# EAGLE board ATX PSU Breakout Mini (EAGLE 6.6.0)
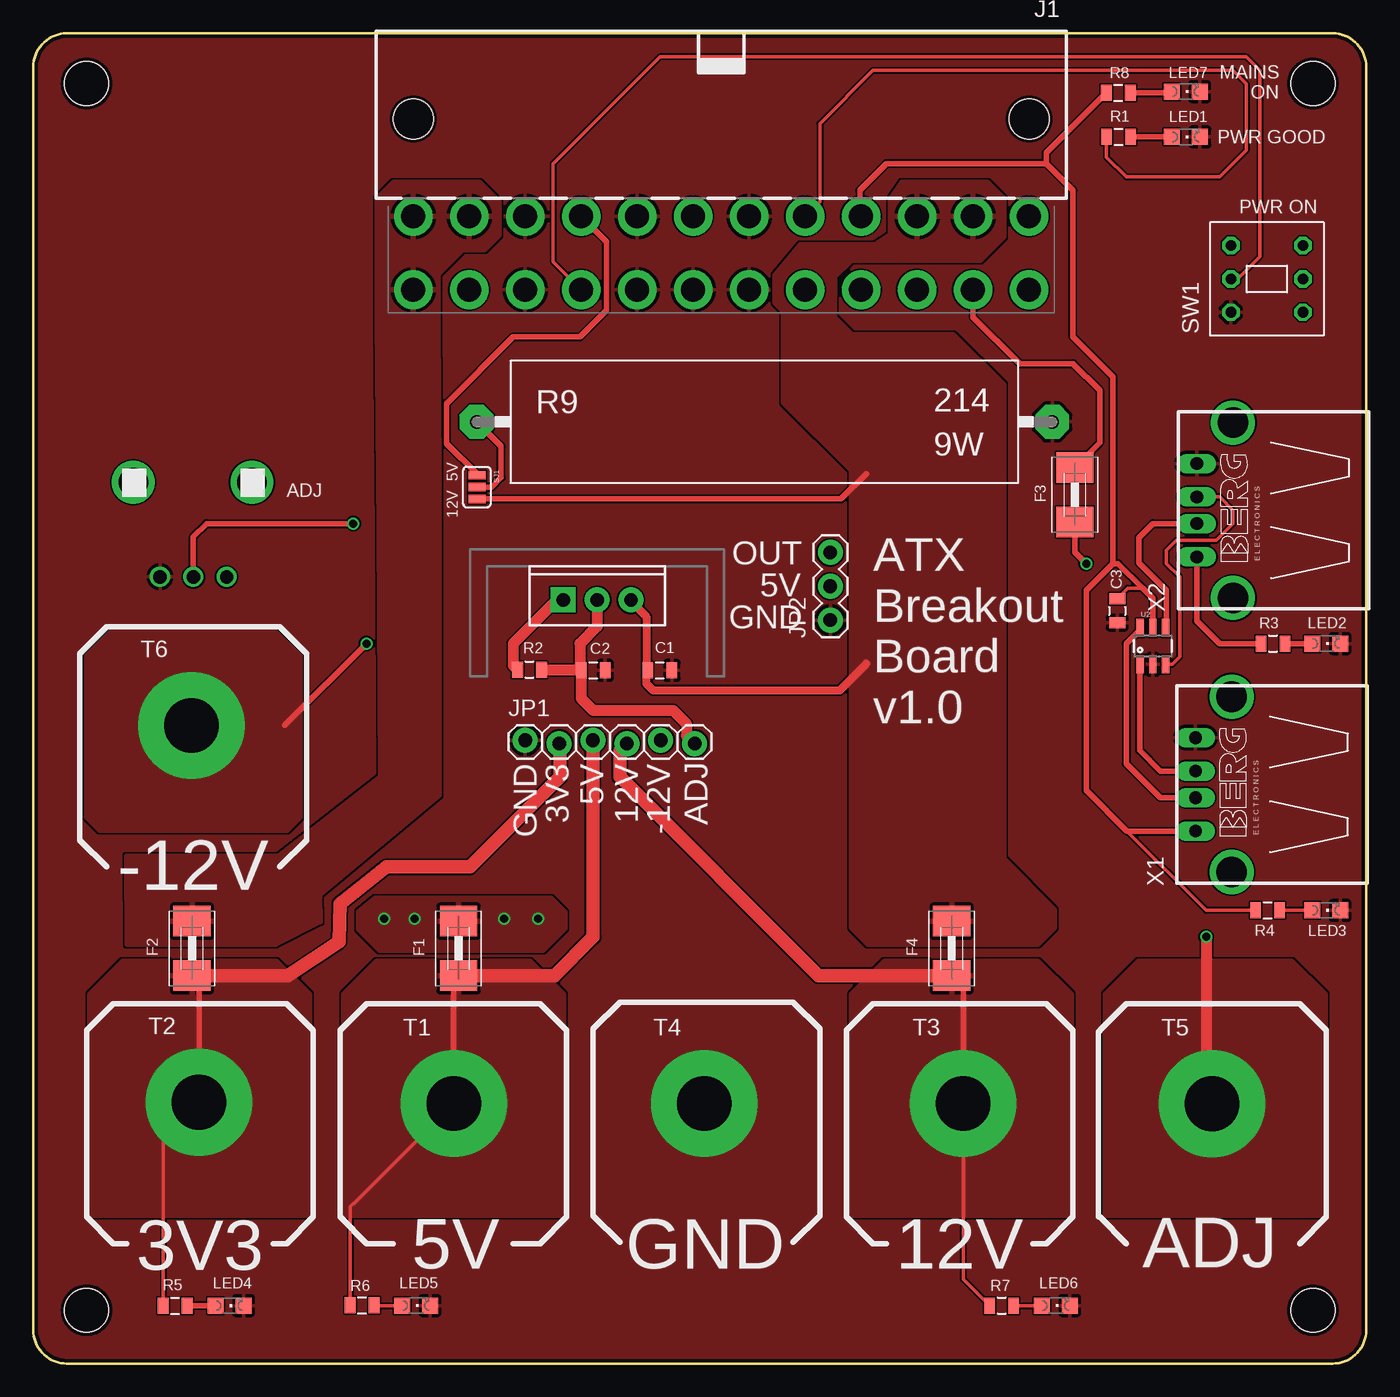
[diagram p0: board, top side]
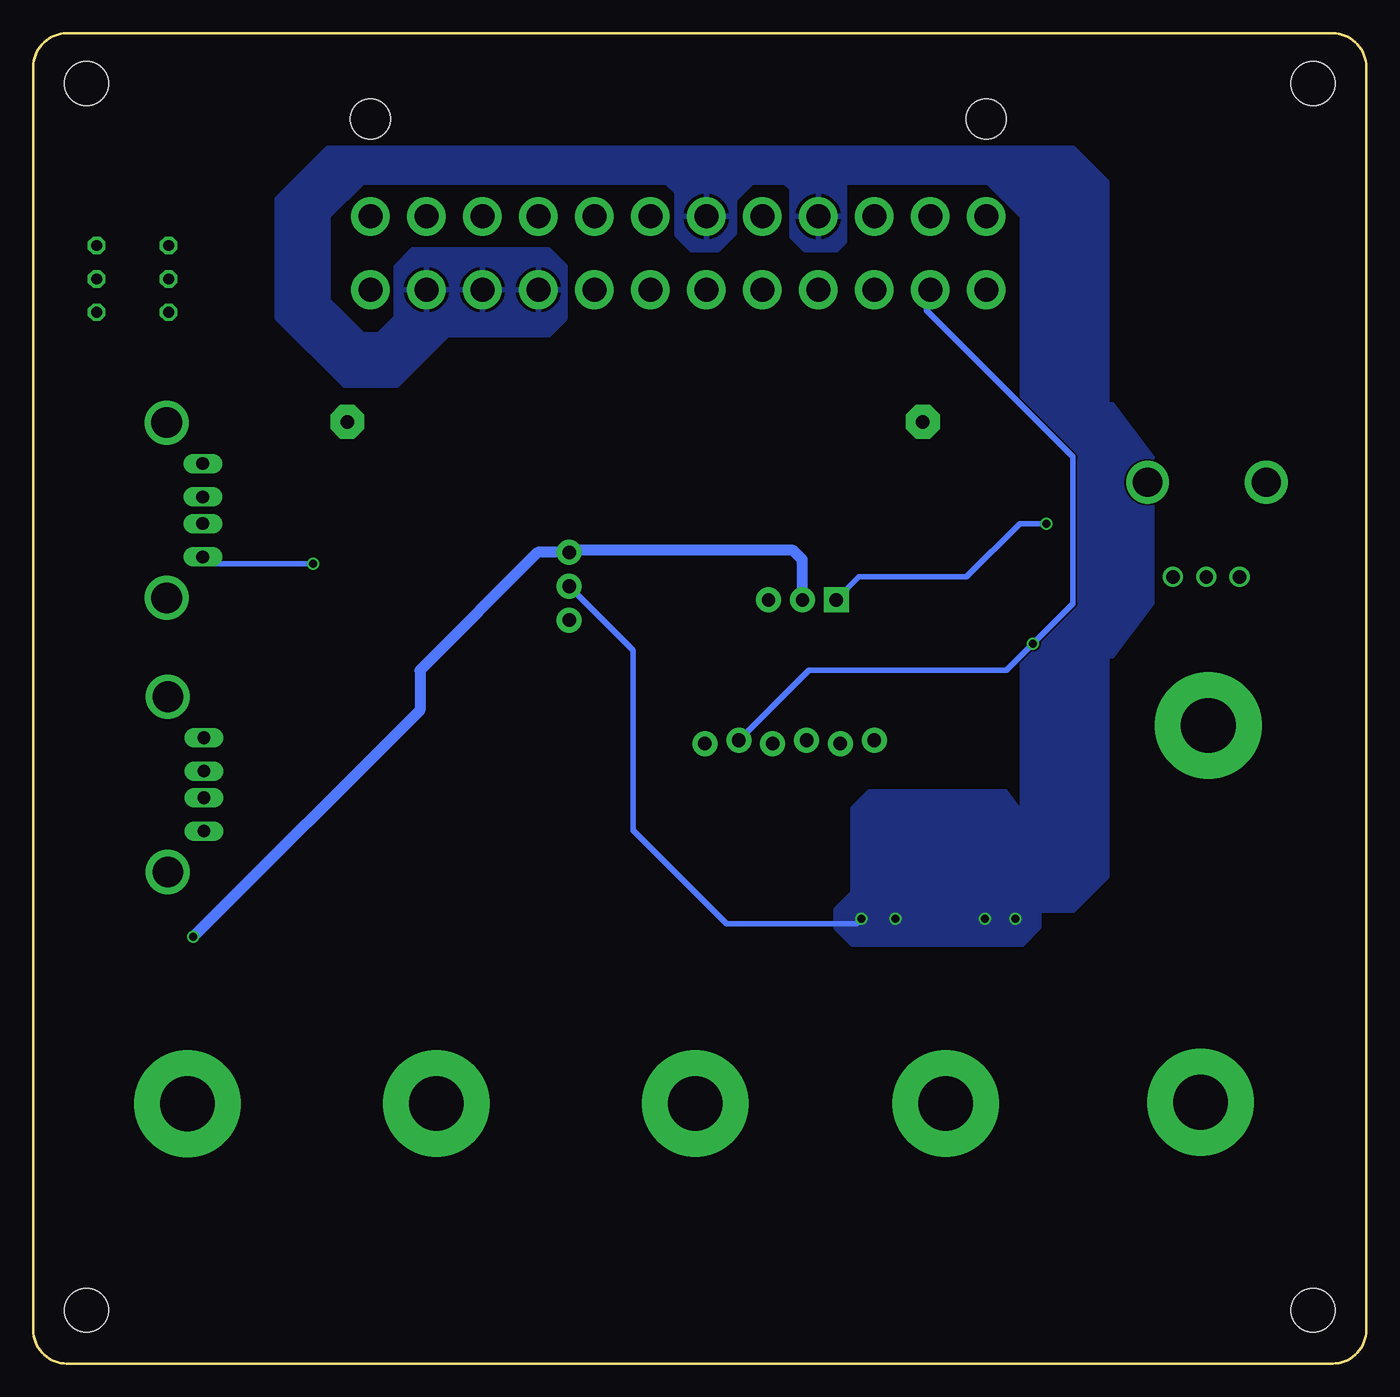
[diagram p1: board, bottom side, seen from below]

Size 100 x 99.77 mm. Coordinates in mm from the lower left corner, seen from the top.
Outline: 2.5,99.77 97.5,99.77 arc-90 100,97.27 100,2.5 arc-90 97.5,0 2.5,0 arc-90 0,2.5 0,97.27 arc-90 2.5,99.77
Copper layers (1*16): Top 0.035mm / dielectric 1.5mm / Bottom 0.035mm
Design rules "dirt_cheap_dirty_boards.v1": minimum track width 5mil, minimum drill 12mil, track to track 5mil, track to pad 5mil, pad to pad 5mil, via to via 5mil, smd to smd 0mil, copper to edge 10mil, drill to drill 10mil, minimum pad ring 10mil, minimum via ring 6mil, stop-mask expansion 2mil, vias tented up to drill 25mil, thermal gap 10mil
tKeepout: area 6.9,14.1 to 17.9,25.1; area 44.9,14 to 55.9,25; area 64.3,14 to 75.3,25; area 26,14 to 37,25; area 82.9,14 to 93.9,25; area 6.4,42.4 to 17.4,53.4

## Footprints (pad centres in the part's own frame; a part is rotated, then mirrored left to right if it is on the bottom)
0805 = smd 0.8 x 1.2: 1 -0.9,0; 2 0.9,0
1812 = smd 2.286 x 2.794: 1 -2.046,0; 2 2.046,0
ATX24_RIGHT_ANGLE = drill 1.8 pad 2.9: 1 23.1,4.76; 2 18.9,4.76; 3 14.7,4.76; 4 10.5,4.76; 5 6.3,4.76; 6 2.1,4.76; 7 -2.1,4.76; 8 -6.3,4.76; 9 -10.5,4.76; 10 -14.7,4.76; 11 -18.9,4.76; 12 -23.1,4.76; 13 23.1,10.26; 14 18.9,10.26; 15 14.7,10.26; 16 10.5,10.26; 17 6.3,10.26; 18 2.1,10.26; 19 -2.1,10.26; 20 -6.3,10.26; 21 -10.5,10.26; 22 -14.7,10.26; 23 -18.9,10.26; 24 -23.1,10.26 | hole 3: -23.1,-2.54; 23.1,-2.54
1X06_LOCK = drill 1.016 pad 1.88: 1 0,0; 2 2.54,-0.254; 3 5.08,0; 4 7.62,-0.254; 5 10.16,0; 6 12.7,-0.254
1X03 = drill 1.016 pad 1.88: 1 0,0; 2 2.54,0; 3 5.08,0
CHIPLED_0805 = smd 1.2 x 1.2: A 0,-1.05; C 0,1.05
KH214-8 = drill 1.016 pad 2.54 octagon: 1 -21.59,0; 2 21.59,0
SJ_3 = smd 0.635 x 1.27: 1 -0.889,0; 2 0,0; 3 0.889,0
SW_PUSH_BUTTON_MINI = drill 0.8 octagon: 1 2.5,2.7; 2 0,2.7; 3 -2.5,2.7; 4 2.5,-2.7; 5 0,-2.7; 6 -2.5,-2.7
PAD_ROUND_4.1MM = drill 4.1 pad 8: P 0,0
TO220-ADJ = drill 1 pad 1.88 square: ADJ -2.54,0 | drill 1 pad 1.88: IN 2.54,0; OUT 0,0
SOT23-6 = smd 0.55 x 1.35: 1 -0.95,-1.375; 2 0,-1.375; 3 0.95,-1.375; 4 0.95,1.375; 5 0,1.375; 6 -0.95,1.375
STAND-OFF = hole 3.302: 0,0
ALPHA_9MM_PCB = drill 1: 1 -2.5,-4; 2 0,-4; 3 2.5,-4 | drill 2.2: P$1 -4.5,3.1; P$2 4.4,3.1
PN87520-S = drill 0.95 long: 1 -3.5,2.71; 2 -1,2.71; 3 1,2.71; 4 3.5,2.71 | drill 2.3 pad 2.9: S1 -6.57,0; S2 6.57,0

## Placement (x,y rotation side)
C1  0.1uF  [0805]  47,52 0 top
C2  1.0uF  [0805]  42,52 0 top
C3  0.1uF  [0805]  81.32,56.46 270 top
F1  3A  [1812]  31.9,31.14 90 top
F2  3A  [1812]  11.9,31.14 90 top
F3  3A  [1812]  78.14,65.17 90 top
F4  3A  [1812]  68.9,31.14 90 top
J1  ATX24RH  [ATX24_RIGHT_ANGLE]  51.61,90.8 180 top
JP1  [1X06_LOCK]  36.91,46.75 0 top
JP2  [1X03]  59.8,55.76 90 top
LED1  GREEN  [CHIPLED_0805]  86.47,92 270 top
LED2  [CHIPLED_0805]  97,54 270 top
LED3  [CHIPLED_0805]  97,34 270 top
LED4  [CHIPLED_0805]  14.72,4.34 270 top
LED5  [CHIPLED_0805]  28.71,4.35 270 top
LED6  [CHIPLED_0805]  76.71,4.35 270 top
LED7  RED  [CHIPLED_0805]  86.45,95.4 270 top
R1  3.3k  [0805]  81.42,92 0 top
R2  330  [0805]  37.23,52.04 0 top
R3  1.2k  [0805]  93,54 0 top
R4  1.2k  [0805]  92.61,34 0 top
R5  1.2k  [0805]  10.64,4.33 0 top
R6  3.3k  [0805]  24.67,4.37 0 top
R7  10k  [0805]  72.65,4.34 0 top
R8  3.3k  [0805]  81.4,95.3 0 top
R9  [KH214-8]  54.85,70.63 0 top
SJ1  [SJ_3]  33.28,65.74 270 top
SW1  SW_PUSH_DPDT  [SW_PUSH_BUTTON_MINI]  92.55,81.35 90 top
T1  5V  [PAD_ROUND_4.1MM]  31.54,19.5 0 top
T2  3V3  [PAD_ROUND_4.1MM]  12.43,19.6 0 top
T3  12V  [PAD_ROUND_4.1MM]  69.77,19.5 0 top
T4  GND  [PAD_ROUND_4.1MM]  50.33,19.5 0 top
T5  ADJ  [PAD_ROUND_4.1MM]  88.44,19.49 0 top
T6  -12V  [PAD_ROUND_4.1MM]  11.85,47.87 0 top
U1  V_REG_317SINK  [TO220-ADJ]  42.3,57.28 0 top
U2  TPS2513  [SOT23-6]  83.99,53.82 0 top
U$1  [STAND-OFF]  96,96 0 top
U$2  [STAND-OFF]  96,4 0 top
U$3  [STAND-OFF]  4,4 0 top
U$4  [STAND-OFF]  4,96 0 top
VR1  ALPHA_9MM_PCB  [ALPHA_9MM_PCB]  12,63 0 top
X1  PN87520-S  [PN87520-S]  89.91,43.44 90 top
X2  PN87520-S  [PN87520-S]  90,64 90 top

## Library data of the parts
C1 = SparkFun-Capacitors; PROD_ID: CAP-11625; VALUE: 1.0uF
C2 C3 = SparkFun-Capacitors; PROD_ID: CAP-11625
F1-F4 LED1-LED7 = adafruit
J1 JP1 JP2 = SparkFun-Connectors
R1-R8 = SparkFun-Resistors
R9 = resistor-power; OC_FARNELL: unknown; OC_NEWARK: unknown
SJ1 = SparkFun-Retired
SW1 = dp_devices.v6
T1-T6 = dp_devices
U1 = SparkFun-PowerIC
U2 = SparkFun-DigitalIC
U$1-U$4 = SparkFun-Electromechanical
VR1 = Fra
X1 X2 = con-berg; OC_FARNELL: unknown; OC_NEWARK: unknown

## Nets
3V3: F2.2 J1.1 J1.2 J1.13
3V3OUT: F2.1 JP1.2 R5.1 T2.P
5V: F1.2 F3.2 J1.4 J1.6 J1.21 J1.22 J1.23 JP2.2 SJ1.1
5V_STDBY: C3.1 J1.9 R4.1 R8.1 U2.5 X1.1
5VOUT: F1.1 JP1.3 R6.1 T1.P
12V: C1.1 F4.2 J1.10 J1.11 SJ1.3 U1.IN
12VOUT: F4.1 JP1.4 R7.1 T3.P
-12V: J1.14 JP1.5 T6.P
DM1: U2.6 X1.2
DM2: U2.4 X2.2
DP1: U2.1 X1.3
DP2: U2.3 X2.3
GND: C1.2 C2.2 C3.2 J1.3 J1.5 J1.7 J1.15 J1.17 J1.18 J1.19 JP1.1 JP2.1 LED1.C LED2.C LED3.C LED4.C LED5.C LED6.C LED7.C R9.2 SW1.3 T4.P U2.2 VR1.1 X1.4 X2.4
N$1: J1.8 R1.1
N$2: LED1.A R1.2
N$7: R9.1 SJ1.2
N$9: R2.1 U1.ADJ VR1.2
N$10: J1.16 SW1.2
N$14: LED7.A R8.2
N$16: LED3.A R4.2
N$17: LED2.A R3.2
N$19: LED4.A R5.2
N$20: LED5.A R6.2
N$21: LED6.A R7.2
USB_P4: F3.1 R3.1 X2.1
VOUT: C2.1 JP1.6 JP2.3 R2.2 T5.P U1.OUT

## Tracks (layer width: path | path; a pad name or v marks a point on that pad's centre or on a via)
3V3
  pour Top: 7.03,31.46 18.19,31.46 21.5,33.14 21.48,35.17 30.43,42.62 30.43,66.42 30.38,78.45 30.38,81.75 32.16,83.53 33.81,83.53 34.95,84.67 34.95,87.09 33.43,88.61 27.08,88.61 25.81,87.34 25.81,78.45 25.94,62.45 26.06,44.02 18.46,38.08 7.01,38.05
3V3OUT
  Top 0.254: T2.P 9.74,16.91 R5.1
  Top 0.406: F2.1 12.43,28.56 T2.P
  Top 1.016: F2.1 19.09,29.09 22.94,31.65 23,34.5 26.5,37.25 32.75,37.25 39.5,44 39.5,46.45 JP1.2
  pour Top: 4.22,11.14 20.73,11.14 20.73,27.65 18.19,30.19 6.76,30.19 4.22,27.65
5V  (via drill 0.6)
  Top 0.406: J1.23 70.51,78.49 74,75 78,75 80,73 80,69.08 F3.2 | SJ1.1 33.28,66.72 31,69 31,72 36,77 41,77 43,79 43,84.15 J1.4
  Bottom 0.406: v37.88,33.37 38.24,33 48,33 55,40 55,53.5 JP2.2
  other vias: 26.32,33.37 28.6,33.37 35.34,33.37
  pour Bottom: 39.14,89.25 39.14,84.16 39.78,83.53 42.07,83.53 43.08,84.55 43.08,88.1 43.59,88.61 46.13,88.61 47.4,87.34 47.4,84.8 48.67,83.53 50.58,83.53 51.72,84.67 51.72,87.85 52.48,88.61 75.34,88.61 77.88,86.07 77.88,79.72 75.34,77.18 74.07,77.18 72.8,78.45 72.8,82.26 71.53,83.53 61.37,83.53 60.1,82.26 60.1,78.45 61.37,77.18 68.99,77.18 72.8,73.37 76.61,73.37 81.69,78.45 81.69,87.34 77.88,91.15 41.05,91.15
  pour Bottom: 39.78,32.73 39.78,34 38.51,35.27 38.51,41.62 37.24,42.89 27.08,42.89 25.81,41.16 25.81,86.07 28.35,88.61 41.05,88.61 41.05,91.15 22,91.15 19.46,88.61 19.46,36.54 22,34 24.54,34 24.54,32.73 25.81,31.46 38.51,31.46
  pour Top: 26,31 24.4,32.6 24.4,33.9 25.65,34.9 38.8,34.9 39.9,33.8 39.9,32.7 38.2,31
  pour Bottom: 20,72 19,72 16,68 16,57 19,53 20,53
5V_STDBY
  Top 0.254: R4.1 88,34 82.06,39.94 | C3.1 82.11,58.15 83.23,58.15
  Top 0.406: 76,90 78,88 78,77 81,74 81,60 | 76,90 64,90 62,88 62,86.15 J1.9 | 76,90 76,90.8 R8.1 | U2.5 84,57.39 83.69,57.69 83.23,58.15 81.38,60 81,60 | 81,60 79,58 79,43 82.06,39.94 X1.1
5VOUT
  Top 0.254: T1.P 24.04,12 24,12 23.77,11.77 R6.1
  Top 0.406: F1.1 31.54,28.73 T1.P | JP1.3
  Top 1.016: F1.1 39.09,29.09 42,32 JP1.3
  pour Top: 23.27,11.14 39.78,11.14 39.78,27.65 37.24,30.19 25.81,30.19 23.27,27.65
12V
  Top 0.406: SJ1.3 60.6,64.85 62.5,66.75
  Top 0.61: U1.IN 44.84,57.16 46,56 46,52.1 C1.1 | C1.1 46.1,51.9 | C1.1 46,51.9 46,51 46.5,50.5 60.5,50.5 62.5,52.5
  pour Top: 75.34,35.27 63.91,35.27 62.64,35.27 61.37,34 61.37,32.73 62.64,31.46 75.34,31.46 76.61,32.73 76.61,34
  pour Top: 64.29,84.67 64.29,87.34 65.18,88.61 71.53,88.61 72.8,87.34 72.8,84.55 71.02,82.77 61.37,82.77 60.1,81.5 60.1,78.45 61.37,77.18 68.99,77.18 72.8,73.37 72.8,37.81 76.61,34 76.61,32.73 75.34,31.46 62.64,31.46 61.37,32.73 61.37,67.02 56.29,72.1 56.29,78.96 55.66,79.59 55.66,81.62 57.56,83.91 63.15,83.91
12VOUT
  Top 0.254: R7.1 69.77,6.33 T3.P
  Top 0.406: F4.1 69.77,28.22 T3.P
  Top 1.016: F4.1 58.91,29.09 44,44 44,45.97 JP1.4
  pour Top: 61.37,11.14 77.88,11.14 77.88,27.65 75.34,30.19 63.91,30.19 61.37,27.65
-12V  (via drill 0.6)
  Top 0.406: 18.87,47.87 v25,54
  Bottom 0.406: J1.14 33,80.25 33,79 22,68 22,57 v25,54 27,52 41.82,52 JP1.5
  pour Top: 4,53 6,55 18,55 20,53 20,41 19,40 5,40 4,41
DM1
  Top 0.406: U2.6 83.04,55.04 82,54 82,45 84.56,42.44 X1.2
DM2
  Top 0.406: U2.4 85,55.25 85,58 82.95,60.05 82.95,61.95 84,63 X2.2
DP1
  Top 0.406: X1.3 84.56,44.44 83,46 83,52 83.04,52.04 U2.1
DP2
  Top 0.254: U2.3 85.44,52.45 86,53 86,59 85,60 85,61 85.75,61.75 88.75,61.75 90,63 90,64 89,65 X2.3
GND
  pour Top (rank 2): 97.5,0 2.5,0 arc-90 0,2.5 0,97.5 arc-90 2.5,100 97.5,100 arc-90 100,97.5 100,2.5 arc-90
  pour Top: 42.27,11.15 58.78,11.15 58.78,27.66 56.24,30.2 44.81,30.2 42.27,27.66
N$1
  Top 0.254: J1.8 59,87.13 59,93 63,97 90,97 91,96 91,91 89,89 82,89 80.52,90.48 R1.1
N$2
  Top 0.406: R1.2 LED1.A
N$7
  Top 0.406: SJ1.2 34.38,65.74 35.11,66.46 35.11,68.78 R9.1
N$9  (via drill 0.6)
  Top 0.406: VR1.2 12,62 13,63 v24,63
  Top 0.813: U1.ADJ 39.28,57.28 36,54 36,52.37 R2.1
  Bottom 0.406: v24,63 26,63 30,59 38.04,59 U1.ADJ
N$10
  Top 0.254: J1.16 39,82.65 39,90 47,98 91,98 92,97 92,83 90.35,81.35 SW1.2
N$14
  Top 0.406: R8.2 85.3,95.3 LED7.A
N$16
  Top 0.254: LED3.A R4.2
N$17
  Top 0.406: R3.2 LED2.A
N$19
  Top 0.406: LED4.A 11.54,4.34 R5.2
N$20
  Top 0.254: R6.2 25.58,4.35 LED5.A
N$21
  Top 0.254: R7.2 LED6.A
USB_P4  (via drill 0.6)
  Top 0.406: F3.1 78.14,60.86 v79,60 | X2.1 87.29,55.71 89,54 R3.1
  Bottom 0.406: v79,60 86.79,60 X2.1
VOUT  (via drill 0.6)
  Top 0.406: 41.06,52.04 C2.1 41.1,52.04
  Top 0.813: v88,32 88,19.93 T5.P | R2.2 41.1,52.04 | U1.OUT 42.3,55.3 41,54 41,52.1 C2.1 41.1,49.9 42,49 48,49 49,48 49,47.11 JP1.6
  Bottom 0.813: U1.OUT 42.3,60.3 43,61 59.64,61 JP2.3 62.16,60.84 71,52 71,49 v88,32
  pour Top: 80.42,11.14 96.93,11.14 96.93,27.65 94.39,30.19 82.96,30.19 80.42,27.65

## Text on the board
tPlace: MAINS / ON | PWR GOOD | PWR ON | ADJ | 12V 5V | OUT | 5V | GND | ATX / Breakout / Board / v1.0 | GND | 3V3 | 5V | 12V | -12V | ADJ | -12V | 3V3 | 5V | GND | 12V | ADJ
200bmp: C:/Users/Fra/Desktop/Untitled-2.bmp | C:/Users/Fra/Desktop/Untitled-2.bmp | C:/Users/Fra/Desktop/Untitled-2.bmp | C:/Users/Fra/Desktop/Untitled-3.bmp